# Altium PCB Atmel AVR consumer electronics control board.PcbDoc (part 2 of 4)
Units mm, origin at the board's own origin, x right, y up, seen from the top; angles counter-clockwise.
Board outline 310.13 x 89.13 mm, 2 copper layers (Top Layer, Top, Bottom Layer, Bottom); 455 components, 162 nets, 940 pads, 0 vias.
Unrouted connection lines stored in the file: 21.
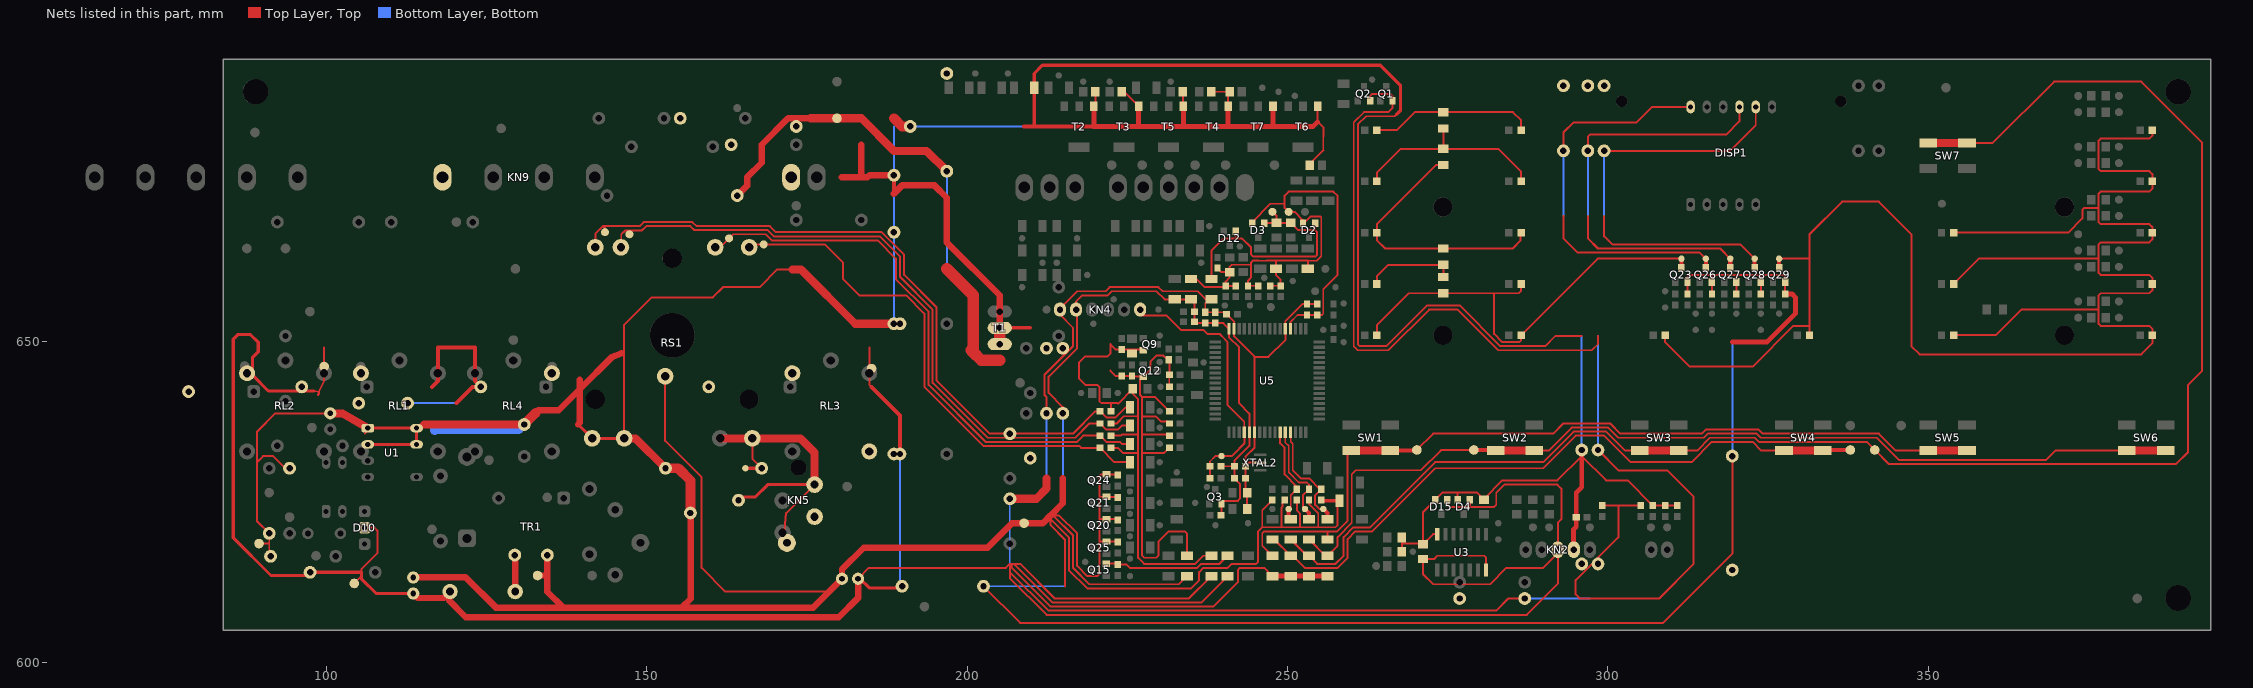
[diagram p2: the nets of this part, all layers, seen from the top]

## Components (designator, comment, footprint, x,y, rotation, side; value= is the part's Value field where it differs from the comment) (continued)
TP111 "TESTPAD" TEST_PAD_1.50mm 97.79,636.587 r90 top
TP113 "TESTPAD" TEST_PAD_1.50mm 222.567,677.545 r0 top
TP114 "TESTPAD" TEST_PAD_1.0mm 236.918,646.747 r0 top
TP115 "TESTPAD" TEST_PAD_1.0mm 230.06,650.938 r0 top
TP116 "TESTPAD" TEST_PAD_1.0mm 208.597,658.495 r0 top
TP117 "TESTPAD" TEST_PAD_1.0mm 211.772,662.305 r0 top
TP118 "TESTPAD" TEST_PAD_1.0mm 208.597,666.115 r0 top
TP119 "TESTPAD" TEST_PAD_1.0mm 214.312,691.515 r0 top
TP120 "TESTPAD" TEST_PAD_1.0mm 218.123,690.562 r0 top
TP121 "TESTPAD" TEST_PAD_1.0mm 244.157,655.637 r0 top
TP122 "TESTPAD" TEST_PAD_1.0mm 242.57,664.845 r0 top
TP123 "TESTPAD" TEST_PAD_1.0mm 218.757,660.4 r0 top
TP124 "TESTPAD" TEST_PAD_1.0mm 213.995,662.305 r0 top
TP125 "TESTPAD" TEST_PAD_1.0mm 217.17,666.115 r0 top
TP126 "TESTPAD" TEST_PAD_1.0mm 206.375,691.832 r0 top
TP127 "TESTPAD" TEST_PAD_1.0mm 201.295,691.832 r0 top
TP128 "TESTPAD" TEST_PAD_1.50mm 185.102,645.795 r0 top
TP129 "TESTPAD" TEST_PAD_1.0mm 246.062,689.61 r0 top
TP130 "TESTPAD" TEST_PAD_1.50mm 235.585,677.545 r0 top
TP131 "TESTPAD" TEST_PAD_1.0mm 235.585,624.84 r0 top
TP132 "TESTPAD" TEST_PAD_1.0mm 225.425,616.14 r0 top
TP133 "TESTPAD" TEST_PAD_1.0mm 172.403,645.795 r0 top
TP134 "TESTPAD" TEST_PAD_1.50mm 181.292,627.38 r0 top
TP135 "TESTPAD" TEST_PAD_1.50mm 133,613.5 r90 top
TP136 "TESTPAD" TEST_PAD_1.0mm 231.775,690.562 r0 top
TP137 "TESTPAD" TEST_PAD_1.50mm 231.457,677.545 r0 top
TP138 "TESTPAD" TEST_PAD_1.0mm 219.71,652.78 r0 top
TP139 "TESTPAD" TEST_PAD_1.0mm 248.602,688.975 r0 top
TP140 "TESTPAD" TEST_PAD_1.50mm 240.347,677.545 r0 top
TP141 "TESTPAD" TEST_PAD_1.50mm 89.535,618.49 r90 top
TP142 "TESTPAD" TEST_PAD_1.0mm 251.142,688.34 r0 top
TP143 "TESTPAD" TEST_PAD_1.50mm 104.394,612.267 r90 top
TP144 "TESTPAD" TEST_PAD_1.50mm 98.425,616.585 r90 top
TP145 "TESTPAD" TEST_PAD_1.0mm 222.25,690.562 r0 top
TP146 "TESTPAD" TEST_PAD_1.50mm 227.33,677.545 r0 top
TP147 "TESTPAD" TEST_PAD_1.0mm 255.587,651.827 r0 top
TP148 "TESTPAD" TEST_PAD_1.0mm 258.762,655.955 r0 top
TP149 "TESTPAD" TEST_PAD_1.0mm 237.807,668.02 r0 top
TP150 "TESTPAD" TEST_PAD_1.0mm 250.825,659.447 r0 top
TP151 "TESTPAD" TEST_PAD_1.25mm 290.83,621.03 r0 top
TP152 "TESTPAD" TEST_PAD_1.0mm 282.892,619.125 r0 top
TP153 "TESTPAD" TEST_PAD_1.0mm 282.892,621.665 r0 top
TP154 "TESTPAD" TEST_PAD_1.25mm 288.29,621.03 r0 top
TP155 "TESTPAD" TEST_PAD_1.0mm 269.558,617.22 r0 top
TP156 "TESTPAD" TEST_PAD_1.25mm 263.842,614.997 r0 top
TP157 "TESTPAD" TEST_PAD_1.0mm 239.712,632.142 r0 top
TP158 "TESTPAD" TEST_PAD_1.0mm 238.76,621.347 r0 top
TP159 "TESTPAD" TEST_PAD_1.0mm 237.427,627.317 r0 top
TP160 "TESTPAD" TEST_PAD_1.0mm 263.207,690.88 r0 top
TP161 "TESTPAD" TEST_PAD_1.0mm 257.493,658.495 r0 top
TP162 "TESTPAD" TEST_PAD_1.0mm 229.87,655.002 r0 top
TP163 "TESTPAD" TEST_PAD_1.0mm 222.885,656.59 r0 top
TP164 "TESTPAD" TEST_PAD_1.0mm 240.22,655.637 r0 top
TP165 "TESTPAD" TEST_PAD_1.0mm 258.762,649.923 r0 top
TP166 "TESTPAD" TEST_PAD_1.0mm 258.762,652.462 r0 top
TP167 "TESTPAD" TEST_PAD_1.50mm 94.297,622.617 r90 top
TP168 "TESTPAD" TEST_PAD_1.50mm 91.123,626.428 r90 top
TR1 "{Value}" NEVA_TRAFO 137.066,625.584 r180 top
U1 "LNK364" "DIP_8_7PIN_LNK364 DIP(Primary)" 106.5,636.5 r0 top
U3 "*" SO_14 273.368,614.362 r90 top
U5 "MEGA_64" QFP_14X14-64 238.76,649.923 r0 top
VDR2 "VDR10 320VAC %10" "VDR F7.5_2 D12 B4.4 H14.5_Primary" 156.845,623.252 r0 bottom
XTAL2 "8MHz" CSTCE_G 245.745,629.92 r90 top

## Footprints (in the part's own frame and the unit in brackets; to place one, negate y for a bottom-side part, rotate by r counter-clockwise, add the part's x,y. Pads: shape width x height; smd on the part's side, far side on the other; paste and mask are expansions set on the pad)
"3HSY81426B4_3HSY81426B4 AMB(Primary)" [mm]
  rrect50% 1.3x2 hole 0.8: 1(0,0)
  oval 1.3x2 hole 0.8: 2(2.54,0) 3(5.08,0) 4(7.62,0) 5(10.16,0) 7(12.7,15.24) 8(10.16,15.24) 9(7.62,15.24) 10(5.08,15.24) 11(2.54,15.24) 12(0,15.24)
  round 1.8 hole 1.8: 13(-10.75,16.12) 14(23.45,16.12)
  silkscreen extent -11.75,-1.88 24.45,17.12
35312_2 [mm]
  oval 1.9x2.6 hole 1: 1(0,0) 2(2.5,0)
  silkscreen extent -2.5,-2.5 5,4
35312_5 [mm]
  oval 1.9x2.6 hole 1: 1(0,0) 2(2.5,0) 3(5,0) 4(7.5,0) 5(10,0)
  silkscreen extent -2.5,-2.5 12.5,4
35312_6 [mm]
  oval 1.9x2.2 hole 1: 1(0,0) 2(2.5,0) 3(5,0) 4(7.5,0) 5(10,0) 6(12.5,0)
  silkscreen extent -2.5,-2.5 15,4
35978_2 [mm]
  oval 2.8x4.2 hole 1.8: 1(0,0) 2(3.96,0)
  silkscreen extent -1.98,-3.2 5.94,4.8
35978_3 [mm]
  oval 2.8x4.2 hole 1.8: 1(0,0) 2(3.96,0) 3(7.92,0)
  silkscreen extent -1.98,-3.2 9.9,4.8
35978_5 [mm]
  oval 2.8x4.2 hole 1.8: 1(0,0) 2(3.96,0) 3(7.92,0) 4(11.88,0) 5(15.84,0)
  silkscreen extent -1.98,-3.2 17.82,4.8
35979_4 [mm]
  oval 2.8x4.2 hole 1.8: 1(0,0) 2(7.92,0) 3(15.84,0) 4(23.76,0)
  silkscreen extent -1.98,-3.2 25.74,4.8
35979_5 [mm]
  oval 2.8x4.2 hole 1.8: 1(0,0) 2(7.92,0) 3(15.84,0) 4(23.76,0) 5(31.68,0)
  silkscreen extent -1.98,-3.2 33.66,4.8
91999_2_91999_0499(Primary) [mm]
  round 2.5 hole 2.5: 5(2.5,2.65)
  round 2.6 hole 1.3: a1(0,0) a2(5,-2.5) b1(0,-5) b2(5,-7.5)
  silkscreen extent -3.65,-11.2 8.65,3.7
C_0603 [mm]
  rect 1.1x1 smd: 1(0.102,0) 2(1.803,0)
  silkscreen extent -0.65,-0.7 2.55,0.7
C_0805_SIE_0805 [mm]
  rect 1.3x1.5 smd: 1(0.127,0) 2(2.413,0)
  silkscreen extent -0.73,-0.95 3.27,0.95
C_1206_SIE_1206 [mm]
  rect 1.29x1.9 smd: 1(0,0) 2(3.175,0)
  silkscreen extent -0.81,-1.1 3.99,1.1
"CER F2.5 D5 H11_Radial" [mm]
  round 1.9 hole 0.9: 1(0,0) 2(2.5,0)
  silkscreen extent -1.25,-2.75 4,2.5
"CER F2.5 D6.3 H11_Primary" [mm]
  round 1.9 hole 0.9: 1(0,0) 2(2.5,0)
  silkscreen extent -1.9,-3.25 4.5,3.15
"CER F5 D12.5 H25" [mm]
  round 2 hole 1: 1(0,0) 2(5,0)
  silkscreen extent -3.75,-6.25 8.8,6.25
"CFR F5 L7.5 B3.5 H12.5_Vertical" [mm]
  round 1.8 hole 0.9: 1(0,0) 2(5.08,0)
  silkscreen extent -1.25,-1.75 6.25,1.75
"CFR F15 L18 B5.3 H11_Primary" [mm]
  round 2 hole 1: 1(0,0) 2(15,0)
  silkscreen extent -1.5,-2.65 16.5,2.65
CSTCE_G [mm]
  rect 0.4x2 smd: 1(0,0) 2(1.2,0) 3(2.4,0)
  silkscreen extent -0.4,-0.65 2.8,0.65
DIP_4_300_MIL [mm]
  rrect50% 2x1.3 hole 0.8: 1(0,0)
  oval 2x1.3 hole 0.8: 2(0,-2.54) 3(7.62,-2.54) 4(7.62,0)
  silkscreen extent -0.89,-3.81 6.1,1.27
"DIP_8_7PIN_LNK364 DIP(Primary)" [mm]
  rrect50% 2x1.3 hole 0.8: 1(0,0)
  oval 2x1.3 hole 0.8: 2(0,-2.54) 3(0,-5.08) 4(0,-7.62) 5(7.62,-7.62) 7(7.62,-2.54) 8(7.62,0)
  silkscreen extent -0.89,-8.89 6.1,1.27
DO_15_500_MIL [mm]
  rrect50% 2.8x2.8 hole 1.4: 1(0,0)
  round 2.8 hole 1.4: 2(12.7,0)
  silkscreen extent 2.54,-1.78 10.16,1.78
DO_35_400_MIL [mm]
  rrect50% 2x2 hole 1: 1(0,0)
  round 2 hole 1: 2(10.16,0)
  silkscreen extent 2.03,-0.89 8.13,0.89
DO_35_500_MIL [mm]
  rrect50% 2x2 hole 1: 1(0,0)
  round 2 hole 1: 2(12.7,0)
  silkscreen extent 3.3,-0.89 9.4,0.89
DO_41_400_MIL [mm]
  oval 2.4x2.4 hole 1.2: 1(0,0) 2(10.16,0)
  silkscreen extent 1.27,-1.27 8.89,1.27
DTSL_62 [mm]
  rect 1.4x2.75 smd: 1(-2,-3.025) 2(2,-3.025) 3(-2,3.025) 4(2,3.025)
  silkscreen extent -3.2,-3.1 3.2,3.1
FIDUCIAL_1.5_3R [mm]
  round 1.5 smd: 1(0,0)
HS_63_10_Z0 [mm]
  Keep-Out Layer, Board lines w0.025: -7.9,-23.55 -7.9,-20.05 ; -7.9,-23.55 -7.9,-20.05 ; -7.9,-23.55 -10.1,-23.55 ; -7.9,-23.55 -10.1,-23.55 ; -7.9,-20.05 -10.1,-20.05 ; -7.9,-20.05 -10.1,-20.05 ; -10.1,-23.55 -10.1,-20.05 ; -10.1,-23.55 -10.1,-20.05 ; 0.1,-23.55 0.1,-20.05 -2.1,-20.05 -2.1,-23.55 0.1,-23.55 ; 0.1,20.05 -2.1,20.05 -2.1,23.55 0.1,23.55 0.1,20.05 ; -7.9,19.95 -7.9,23.45 -10.1,23.45 -10.1,19.95 -7.9,19.95
  silkscreen extent -10,-31.5 8,31.5
J_0805 [mm]
  rect 1.29x1.6 smd: 1(0,0) 2(2.54,0)
  silkscreen extent -0.78,-0.95 3.32,0.95
J_1206 [mm]
  rect 1.29x1.9 smd: 1(0,0) 2(3.175,0)
  silkscreen extent -0.81,-1.1 3.99,1.1
JMP_300 [mm]
  round 2 hole 1: 1(0,0) 2(7.62,0)
  silkscreen extent 1.27,-0.19 6.35,0.19
JMP_350 [mm]
  round 2 hole 1: 1(0,0) 2(8.89,0)
  silkscreen extent 1.27,-0.19 7.62,0.19
JMP_400 [mm]
  round 2 hole 1: 1(0,0) 2(10.16,0)
  silkscreen extent 1.27,-0.19 8.89,0.19
JMP_500 [mm]
  round 2 hole 1: 1(0,0) 2(12.7,0)
  silkscreen extent 1.27,-0.19 11.43,0.19
JMP_600_600_MIL [mm]
  round 2 hole 1: 1(0,0) 2(15.24,0)
  silkscreen extent 1.27,-0.19 13.97,0.19
JMP_700 [mm]
  round 2 hole 1: 1(0,0) 2(17.78,0)
  silkscreen extent 1.27,-0.19 16.51,0.19
JMP_800 [mm]
  round 2 hole 1: 1(0,0) 2(20.32,0)
  silkscreen extent 1.27,-0.19 19.05,0.19
JS1 [mm]
  round 2.5 hole 1.3: 1(0,0) 2(2,-6) 3(14.2,-6) 4(14.2,6) 5(2,6)
  silkscreen extent -2.3,-8 19.7,8
LTST_0805_N [mm]
  rect 1.15x1.2 smd: 1(-0.95,0) 2(0.95,0)
  silkscreen extent -1.91,-0.83 1.91,0.83
MINI_MELF_POL_Detent [mm]
  round 0 smd paste-25.4 mask-25.4: 1(-0.112,0) 2(3.287,0)
  Top Layer, Top region: 3.988,0.9 2.587,0.9 2.587,0.25 3.087,0.25 3.087,-0.25 2.587,-0.25 2.587,-0.9 3.988,-0.9
  Top Layer, Top region: -0.813,-0.9 0.588,-0.9 0.588,-0.25 0.088,-0.25 0.088,0.25 0.588,0.25 0.588,0.9 -0.813,0.9
  silkscreen extent -1.01,-1.1 4.19,1.1
NEVA_TRAFO [mm]
  rrect50% 2x2 hole 1: 1(0,0)
  round 2 hole 1: 2(10.16,0) 3(7.62,8.89) 4(2.54,8.89)
  silkscreen extent -1.91,-1.91 12.06,10.8
QFP_14X14-64 [mm]
  rect 1.8x0.5 smd: 1(0,0) 2(0,-0.8) 3(0,-1.6) 4(0,-2.4) 5(0,-3.2) 6(0,-4) 7(0,-4.8) 8(0,-5.6) 9(0,-6.4) 10(0,-7.2) 11(0,-8) 12(0,-8.8) 13(0,-9.6) 14(0,-10.4) 15(0,-11.2) 16(0,-12) 33(16.2,-12) 34(16.2,-11.2) 35(16.2,-10.4) 36(16.2,-9.6) 37(16.2,-8.8) 38(16.2,-8) 39(16.2,-7.2) 40(16.2,-6.4) 41(16.2,-5.6) 42(16.2,-4.8) 43(16.2,-4) 44(16.2,-3.2) 45(16.2,-2.4) 46(16.2,-1.6) 47(16.2,-0.8) 48(16.2,0)
  rect 0.5x1.8 smd: 17(2.1,-14.1) 18(2.9,-14.1) 19(3.7,-14.1) 20(4.5,-14.1) 21(5.3,-14.1) 22(6.1,-14.1) 23(6.9,-14.1) 24(7.7,-14.1) 25(8.5,-14.1) 26(9.3,-14.1) 27(10.1,-14.1) 28(10.9,-14.1) 29(11.7,-14.1) 30(12.5,-14.1) 31(13.3,-14.1) 32(14.1,-14.1) 49(14.1,2.1) 50(13.3,2.1) 51(12.5,2.1) 52(11.7,2.1) 53(10.9,2.1) 54(10.1,2.1) 55(9.3,2.1) 56(8.5,2.1) 57(7.7,2.1) 58(6.9,2.1) 59(6.1,2.1) 60(5.3,2.1) 61(4.5,2.1) 62(3.7,2.1) 63(2.9,2.1) 64(2.1,2.1)
  silkscreen extent 0.01,-12.9 15,2.13
R_0603 [mm]
  rect 1.1x1 smd: 1(0.102,0) 2(1.803,0)
  silkscreen extent -0.65,-0.7 2.55,0.7
R_0805_IPC_102A [mm]
  rect 1.3x1.5 smd: 1(0.32,0) 2(2.22,0)
  silkscreen extent -0.53,-0.95 3.07,0.95
R_0805_SIE_0805 [mm]
  rect 1.3x1.5 smd: 1(0.127,0) 2(2.413,0)
  silkscreen extent -0.73,-0.95 3.27,0.95
R_1206_SIE_1206 [mm]
  rect 1.29x1.9 smd: 1(0,0) 2(3.175,0)
  silkscreen extent -0.81,-1.1 3.99,1.1
RES_0207_400_MIL [mm]
  round 2 hole 1: 1(0,0) 2(10.16,0)
  silkscreen extent 1.65,-0.89 8.51,0.89
RES_0516 [mm]
  round 2.8 hole 1.2: 1(0,0) 2(22.86,0)
  silkscreen extent 2.23,-2.5 20.64,2.5
SDKZ1G0100_SDKZ1G0100(Primary) [mm]
  round 2.6 hole 1.3: 1(12.5,-16.1) 2(-12.5,-16.1) 3(12,13.7) 4(8,13.7) 5(-6.7,13.7) 6(-12,13.7) 8(1.1,-6.4) 9(7.5,-16.1) 10(-7.5,-16.1)
  round 3 hole 3 unplated: 10(0,12) 11(12,-10) 12(-12,-10)
  round 7 hole 7: 13(0,0)
  silkscreen extent -15.1,-17.1 15.1,15
SO_14 [mm]
  rect 2x0.65 smd: 1(0,0) 2(0,-1.27) 3(0,-2.54) 4(0,-3.81) 5(0,-5.08) 6(0,-6.35) 7(0,-7.62) 8(5.588,-7.62) 9(5.588,-6.35) 10(5.588,-5.08) 11(5.588,-3.81) 12(5.588,-2.54) 13(5.588,-1.27) 14(5.588,0)
  silkscreen extent -1.02,-8.25 4.32,1.27
SOD_57_400_MIL [mm]
  round 2.3 hole 1.1: 1(0,0) 2(10.16,0)
  silkscreen extent 1.52,-1.93 8.64,1.93
SOT_23(AKC)_IPC_210 [mm]
  rect 1x1.2 smd: 1(0.002,-0.148) 2(1.903,-0.148) 3(0.952,2.053)
  silkscreen extent -0.55,0.25 2.45,1.65
SOT_23(BEC)_IPC_210 [mm]
  rect 1x1.2 smd: 1(0.002,-0.148) 2(1.903,-0.148) 3(0.953,2.053)
  silkscreen extent -0.55,0.25 2.45,1.65
SOT_223(A1A2G) [mm]
  rect 1.2x1.5 smd: 1(-2.3,0) 2(0,0) 3(2.3,0)
  rect 3.3x1.5 smd: 4(0,6.4)
  silkscreen extent -3.3,1.4 3.3,4.95
TEST_PAD_1.0mm [mm]
  round 1 smd: 1(0,0)
TEST_PAD_1.25mm [mm]
  round 1.25 smd: 1(0,0)
TEST_PAD_1.50mm [mm]
  round 1.5 smd: 1(0,0)
TO_92(RAC) [mm]
  rrect50% 1.8x1.8 hole 0.8: 1(0,0) 2(2.54,0) 3(5.08,0)
  silkscreen extent 0.03,-1.52 5.07,2.67
TO_220AB(A1A2G)_TO_220AB [mm]
  oval 1.9x3.8 hole 1: 1(0,0) 2(2.54,0) 3(5.08,0)
  silkscreen extent -2.54,-2.54 7.62,3.17
"VDR F7.5_2 D12 B4.4 H14.5_Primary" [mm]
  round 2 hole 1: 1(0,0) 2(7.5,-2)
  silkscreen extent -2.25,-3.2 9.75,1.2

## Part data
C1: "CAP TH AL. ELEC 10uF 25V %20 85C F=2.5/5x11"
C2: "CAP TH AL. ELEC 10uF 450V %20 105C HRL F=5/12.5X25"
C4: "Capacitor"
C5 C7: "CAP TH AL. ELEC 220uF 16V %20 105C F=2.5/6.3x11"
C6 C23 C27 C32 C45: "CAP 0603 CER 100nF 50V %10 X7R"
C8 C10 C13 C30 C34 C47 C53 C54 C55 C56 C57 C58 C59 C60 C61: "CAP 0603 CER 10nF 50V %10 X7R"
C11: "CAP TH POLY 100nF 63Vdc %5 MKT F=5mm"
C12: "CAP 0805 CER 10nF 50V %10 X7R"
C15 C49 C50: "CAP 0603 CER 560pF 50V %10 X7R"
C16: "CAP 0805 CER 1nF 50V %10 X7R"
C17: "CAP 1206 CER 1nF 50V %10 X7R"
C28 C29 C31 C33 C43 C46 C48: "CAP 0603 CER 1nF 50V %10 X7R"
C35: "CAP 0805 CER 470nF 50V %10 X7R"
D2 D5 D7 TR1: "{Description}"
D3 D4 D12 D15: "DIODE SMD 70V 200mA BAV99"
D6: "DIODE TH 600V 1A BYV26C"
D8: "DIODE ZENER TVS TH 200V 100A 600W"
D9 D27: "DIODE SMD 100V 150mA 1N4148"
D10: "LINEAR TH TL431ACLP +2.5V %1 SHUNT REGULATOR"
D11: "DIODE TH 60V 1A SB160"
D31 D33 D34 D35: "Fast Diode"
DISP1: "Display"
F1 F2 F4: "Fiducial"
HS1: "HEAT SINK EROS (CMI)"
J1 J2 J3 J4 J5 J6 J7 J8 J9 J11 J12 J13 J14 J15 J16 J17 J19 J20 J21 J22 J23 J24 J25 J26 J28 J29 J30 J31 J33 J34 J35 J37 J38 J39 J40 J41 J42 J44 J53 J55: "Jumper"
J18: "JUMPER TELI 350mil / 0.6mm KALAYLI"
JM1: "JUMPER TELI 800mil / 0.6mm KALAYLI"
JM2: "JUMPER TELI 500mil / 0.6mm KALAYLI"
JM3: "JUMPER TELI 400mil / 0.6mm KALAYLI"
KN1: "KONN 7.92mm 5' LI DIK 35979_0510"
KN2: "KONN 2.50mm 5' LI DIK 35312_0510"
KN3: "KONN 3.96mm 5' LI DIK 35978_0510"
KN4: "KONN 2.50mm 6' LI DIK 35312_0610"
KN5: "PIN HEADER 5mm 2'LI DIK 16A 91999_0499"
KN6: "KONN 3.96mm 3'LU DIK 35978_0310"
KN7: "2.50 mm Header"
KN8: "KONN 3.96mm 2'LI DIK 35978_0210"
KN9: "KONN 7.92mm 4'LU DIK 35979_0410"
LD1 LD2 LD3 LD4 LD5 LD6 LD7 LD8 LD9 LD10 LD11 LD12 LD13 LD14 LD15 LD16 LD17 LD18 LD19 LD20: "Led"
OPT1: "OPTOCOUPLER TH TRANS PC817A (CRT=80 to 160 (%))"
Q1 Q2 Q9: "TRANS SMD NPN BC847B SOT-23"
Q3 Q12 Q20 Q21 Q24 Q25: "TRANS SMD PNP BC857B SOT-23"
Q15: "TRANS SMD NPN BC817-25/40 SOT-23"
Q23 Q26 Q27 Q28 Q29: "TRANS SMD PNP BC807-25 SOT-23"
R1 R2 R11 R55 R96: "RES 0603 10K %5 1/10W"
R3 R5 R12 R15 R16 R17 R20 R24 R31 R36: "RES 0805 300R %5 1/8W"
R4: "RES AXIAL CARB 100R %5 1/4W FP"
R6 R7 R14 R27: "RES AXIAL CARB 10K %5 1/4W"
R8 R10: "RES 0805 33K %5 1/8W"
R9 R100: "RES AXIAL CARB 1K %5 1/4W"
R18 R88 R134 R144 R148 R149 R150 R151 R165 R167 R168 R179: "RES 0603 47K %5 1/10W"
R19 R46: "RES AXIAL MET. FILM 150K %1 1/2W SS HV"
R21 R34 R61 R73 R91: "RES 1206 330R %5 1/4W"
R23: "RES AXIAL 22R %5 2W WW"
R26: "RES 0603 1K5 %1 1/10W"
R35 R38: "RES 0805 100K %1 1/8W"
R39: "RES 0805 560R %1 1/8W"
R40 R70: "RES 0805 4K7 %5 1/8W"
R41: "RES 0805 1K5 %1 1/8W"
R42: "RES 0805 150R %5 1/8W"
R43: "RES 1206 300R %5 1/4W"
R50 R62 R74 R80 R81 R86: "RES 0805 1K %5 1/8W"
R53 R112: "RES 0603 1K %5 1/10W"
R56: "RES 0805 22K %5 1/8W"
R66 R84: "RES 0805 18K %1 1/8W"
R67 R108 R157 R159 R163: "RES 0603 100K %5 1/10W"
R68: "RES AXIAL CARB 13K %5 1/4W"
R69: "RES AXIAL CARB 22K %5 1/4W"
R82 R85: "RES 1206 18K %1 1/4W"
R97 R103 R109 R111 R145 R146 R153 R155 R158 R160 R161 R164 R166 R169 R172: "RES 1206 10K %5 1/4W"
R98: "RES 0805 10K %5 1/8W"
R101: "RES 0603 330K %5 1/10W"
R102: "RES 0603 22K %5 1/10W"
R110: "RES 0603 33K %5 1/10W"
R113 R130 R131: "RES 1206 220K %1 1/4W"
R115: "RES AXIAL CARB 47R %5 1/4W"
R116: "RES 1206 6K8 %5 1/4W"
R117 R132 R133: "RES 1206 150K %5 1/4W"
R120: "RES 0805 6K8 %5 1/8W"
R121 R124 R125 R126 R127 R128 R129 R135 R136 R154 R156 R162 R170: "RES 1206 100K %5 1/4W"
R137: "RES 1206 8K2 %1 1/4W"
R152 R171 R173 R175 R177: "RES 0603 6K8 %5 1/10W"
RL1 RL2 RL3 RL4: "RELAY SPDT 5V 10A 16x22x16mm FULLY SEALED"
RS1: "ANAHTAR TH ROTARY SWITCH DIK 16 POSITIONS(15 + ON/OFF)"
SW1 SW2 SW3 SW4 SW5 SW6 SW7: "ANAHTAR SMD TACT VERT 160GF 6x6x3.1mm"
T1: "TRIAC TH BTB16-600BW"
T2 T3 T4 T5 T6 T7: "TRIAC SMD 600V 1A Z0107MN"
TP1 TP2 TP3 TP4 TP5 TP6 TP7 TP8 TP10 TP11 TP17 TP20 TP21 TP22 TP23 TP24 TP25 TP26 TP27 TP28 TP29 TP30 TP31 TP32 TP33 TP34 TP35 TP36 TP37 TP38 TP39 TP40 TP41 TP42 TP43 TP44 TP45 TP46 TP47 TP48 TP49 TP50 TP51 TP52 TP53 TP54 TP55 TP56 TP57 TP58 TP59 TP60 TP61 TP62 TP63 TP64 TP65 TP66 TP67 TP68 TP69 TP70 TP71 TP72 TP73 TP74 TP75 TP76 TP77 TP78 TP79 TP80 TP81 TP82 TP83 TP84 TP85 TP86 TP87 TP88 TP89 TP90 TP91 TP92 TP93 TP94 TP95 TP96 TP97 TP98 TP99 TP100 TP101 TP102 TP103 TP104 TP105 TP106 TP107 TP108 TP109 TP110 TP111 TP113 TP114 TP115 TP116 TP117 TP118 TP119 TP120 TP121 TP122 TP123 TP124 TP125 TP126 TP127 TP128 TP129 TP130 TP131 TP132 TP133 TP134 TP135 TP136 TP137 TP138 TP139 TP140 TP141 TP142 TP143 TP144 TP145 TP146 TP147 TP148 TP149 TP150 TP151 TP152 TP153 TP154 TP155 TP156 TP157 TP158 TP159 TP160 TP161 TP162 TP163 TP164 TP165 TP166 TP167 TP168: "Test Pad"
U1: "IC SMPS CONTROLLER THD LNK364PN"
U3: "LOGIC SMD 4069 HEX INVERTER"
U5: "Microcontroller"
VDR2: "KODSUZ"
XTAL2: "REZ CER SMD 8MHz 15pF %0.5 80C"

## Free pads (board coordinates)
  round 4 hole 4 unplated: 0(89,689) 0(389,610) 0(389,689)
  oval 2.8x4.2 smd: 0(243.355,674.053)
  round 3 hole 3 unplated: 0(274.25,651) 0(274.25,671) 0(371.25,651) 0(371.25,671)
  round 1.5 smd: 1(382.587,609.918)

## Nets (pads, with @x,y where several pads share a name; then routed paths per layer and width w, separated by ;. In a path a pad name is that pad's centre, name@x,y a point inside that pad or via, vN(x,y) a via of type N, cw(c..) or ccw(c..) an arc to the next point about the centre after c; other vN are vias at no path point)
0V: C1.1 C2.1 C4.2 C5.2 C7.2 C8.2 C10.2 C12.1 C13.2 C15.1 C16.2 C17.2 C23.1 C27.1 C28.1 C29.1 C30.2 C31.2 C32.2 C34.2 C35.2 C43.2 C45.1 C46.1 C47.1 C48.1 C49.2 C50.2 C53.1 C54.1 C55.1 C56.1 C57.1 C58.1 C59.1 C60.1 C61.1 D2.2 D3.2 D4.2 D11.1 D15.2 D27.1 J5.1 J5.2 J15.1 J15.2 J18.1 J18.2 J21.1 J21.2 J23.1 J23.2 J26.1 J26.2 J29.1 J29.2 J30.1 J30.2 J35.1 J35.2 KN2.2 KN4.5 KN8.2 Q3.2 Q12.2 Q20.2 Q21.2 Q23.2 Q24.2 Q25.2 Q26.2 Q27.2 Q28.2 Q29.2 R4.2 R7.2 R9.2 R11.2 R18.1 R35.2 R40.2 R50.2 R62.2 R67.1 R69.2 R74.2 R80.2 R81.2 R82.2 R85.2 R86.2 R88.1 R100.2 R101.1 R102.2 R110.1 R124.2 R137.1 R144.1 R148.1 R149.1 R150.1 R151.1 R165.1 R167.1 R168.1 R179.1 RL3.3 RS1.1 RS1.8 RS1.9 T1.1 T2.1 T3.1 T4.1 T5.1 T6.1 T7.1 TP5.1 TP10.1 TP135.1 TP141.1 TR1.3 TR1.4 U1.1 U1.2 U1.7 U1.8 U3.14 U5.21 U5.52 U5.64 VDR2.1 | length 1512.5
  Top Layer, Top w0.292: D27.1@222.362,645.477 223.212,644.627 R67.1@224.155,644.627 ; 222.567,657.86 229.552,657.86 ; 227.33,632.625 227.33,616.585 227.647,616.267 229.552,616.267 229.87,616.585 229.87,618.808 231.457,620.395 233.998,620.395 234.315,620.077 J21.1@234.315,616.585 ; 227.33,635.483 231.395,635.483 C60.1@231.56,635.317 ; 227.33,638.34 229.425,638.34 230.226,637.54 231.242,637.54 C57.1@231.56,637.222 ; C31.2@231.56,642.938 C30.2@231.56,644.842 ; R137.1@232.41,656.59 J35.2@234.95,656.59 235.483,656.057 R88.1@235.483,654.685 R18.1@235.483,653.097 ; R74.2@233.678,688.975 233.678,686.832 T5.1@233.758,686.752 ; R62.2@238.123,688.975 R81.2@240.985,688.975 240.743,688.733 T4.1@240.743,686.752 ; R11.2@239.61,622.935 239.71,623.035 Q3.2@239.71,624.692 240.175,625.158 242.252,625.158 242.57,625.475 242.57,627.8 C45.1@241.72,628.65 ; 240.982,661.67 241.3,661.987 244.323,661.987 ; 241.617,615.315 245.11,615.315 245.427,615.632 245.427,620.395 246.062,621.03 ; C10.2@243.84,658.71 C50.2@245.427,658.71 ; 245.491,662.622 246.697,662.622 ; C8.2@247.332,658.71 C49.2@248.92,658.71 ; C48.1@247.65,625.26 246.062,623.672 246.062,621.03 ; C61.1@249.555,625.26 249.237,624.942 249.237,624.269 249.085,624.116 249.085,621.03 ; U5.52@250.46,652.023 250.46,653.05 251.562,654.152 C29.1@253.047,654.152 C27.1@254.635,654.152 255.372,654.152 255.587,654.367 255.587,658.178 257.81,660.4 257.81,672.783 257.175,673.418 256.222,673.418 ; C59.1@251.46,625.26 251.46,623.659 251.93,623.189 251.93,621.03 ; 253.174,662.622 254.571,662.622 255.27,663.321 255.27,669.417 255.143,669.544 254.19,669.544 ; C56.1@253.365,625.26 253.365,624.624 254.8,623.189 254.8,621.03 ; 254.713,684.29 T6.1@254.713,686.752 ; 255.587,679.831 255.587,681.99 ; C17.2@258.127,625.158 257.81,624.84 257.81,621.347 257.493,621.03 254.8,621.03 ; 260.985,657.86 260.985,649.605 261.303,649.288 265.43,649.288 271.78,655.637 276.86,655.637 283.21,649.288 290.195,649.288 291.782,650.875 295.91,650.875 ; C16.2@267.843,617.22 267.843,618.49 ; R40.2@267.843,619.442 267.843,618.49 ; C12.1@271.145,618.363 271.018,618.49 267.843,618.49 ; 246.063,621.03 249.085,621.03 ; 249.085,621.03 251.93,621.03 ; 251.93,621.03 254.8,621.03
  Top Layer, Top w0.3: TP141.1@89.535,618.49 91.123,618.49 ; R7.2@90.805,620.712 R7.2@91.123,620.077 ; R4.2@91.34,616.5 91.123,616.717 91.123,618.49 ; R9.2@94.297,630.237 93.662,630.237 91.757,632.142 90.17,632.142 89.218,631.19 ; C1.1@100.647,638.81 92.075,638.81 89.218,635.952 89.218,631.19 ; 89.218,631.19 89.218,621.982 R7.2@91.123,620.077 ; 91.123,618.49 R7.2@91.123,620.077
  Top Layer, Top w0.305: 106.045,635.635 106.5,636.09 U1.1@106.5,636.5 ; RS1.9@146.5,634.9 146.5,652.595 150.812,656.908 160.338,656.908 161.925,658.495 167.64,658.495 170.41,661.265 172.752,661.265 ; RS1.8@152.9,644.6 152.9,634.5 158.6,628.8 158.6,614.7 162.3,611 178.5,611 ; J29.1@202.565,611.822 208.28,606.107 308.61,606.107 319.405,616.902 J23.1@319.405,632.142 ; J5.1@214.947,638.81 214.947,639.762 212.725,641.985 212.725,644.525 217.17,648.97 217.17,654.845 KN4.5@217.012,655.002 217.012,656.272 217.965,657.225 221.933,657.225 222.567,657.86 ; 215.265,611.822 215.265,619.125 213.042,621.347 213.042,622.3 ; T2.1@219.788,686.752 220.025,686.99 R50.2@220.025,688.975 ; R168.1@223.52,618.705 223.42,618.805 Q25.2@221.763,618.805 221.76,618.808 220.662,618.808 ; R144.1@223.52,622.198 223.42,622.298 Q20.2@221.763,622.298 221.76,622.3 220.662,622.3 ; R165.1@223.52,625.69 223.42,625.79 Q21.2@221.763,625.79 221.76,625.793 220.662,625.793 ; R167.1@223.52,629.183 223.42,629.283 Q24.2@221.763,629.283 220.978,629.283 220.662,628.967 220.662,625.793 ; R80.2@224.153,688.975 224.55,688.975 T3.1@226.773,686.752 ; R67.1@224.155,644.627 C32.2@225.742,644.627 225.842,644.527 Q12.2@227.5,644.527 ; 229.552,657.86 230.822,656.59 R137.1@232.41,656.59 ; C58.1@231.56,633.413 230.773,632.625 227.33,632.625 227.33,635.483 227.33,638.34 227.33,641.35 ; C54.1@231.56,639.127 229.337,641.35 227.33,641.35 ; C30.2@231.56,644.842 231.56,646.747 231.457,646.85 R102.2@231.457,647.167 231.292,647.167 230.632,647.827 229.552,647.827 228.6,646.875 228.6,645.627 Q12.2@227.5,644.527 ; J21.2@234.315,613.41 233.045,612.14 219.075,612.14 216.535,614.68 216.535,619.76 213.44,622.855 ; J35.1@234.95,659.765 235.839,659.765 237.109,658.495 240.132,658.495 C15.1@240.347,658.71 ; R18.1@235.483,653.097 235.697,652.882 C23.1@237.172,652.882 C28.1@238.76,652.882 240,652.882 U5.64@240.86,652.023 240.86,650.68 242.443,649.097 242.443,640.397 244.06,638.781 U5.21@244.06,635.823 244.06,633.73 241.72,631.39 C46.1@241.72,630.555 ; R101.1@239.077,661.455 239.688,660.844 C35.2@240.982,660.844 ; C43.2@239.61,630.555 C46.1@241.72,630.555 ; 240.982,661.67 C35.2@240.982,660.844 ; 241.617,615.315 241.3,615.315 240.665,614.68 236.855,614.68 236.22,614.045 236.22,612.775 234.95,611.505 218.757,611.505 215.9,614.362 215.9,619.442 213.042,622.3 ; C45.1@241.72,628.65 C46.1@241.72,630.555 ; C34.2@241.935,658.71 C15.1@240.347,658.71 ; C10.2@243.84,658.71 243.84,659.524 244.323,660.006 244.323,661.987 244.335,662 244.335,662.343 244.615,662.622 245.491,662.622 ; D3.2@244.477,668.485 244.477,668.65 247.34,671.512 249.555,671.512 ; 246.697,662.622 248.221,662.622 ; C49.2@248.92,658.71 248.92,659.663 248.221,660.361 R85.2@248.221,661.352 248.221,662.622 ; R82.2@253.174,661.352 253.174,662.622 248.221,662.622 ; R86.2@253.494,677.545 253.494,677.738 255.587,679.831 ; 254.19,669.544 253.619,669.544 252.56,668.485 D2.2@252.415,668.485 252.415,668.97 251.142,670.242 TP5.1@250.19,670.242 249.555,670.877 249.555,671.512 ; 254.713,684.29 255.587,683.415 255.587,681.99 ; 256.222,673.418 250.19,673.418 249.555,672.783 249.555,671.512 ; 260.985,657.86 260.985,683.895 262.255,685.165 266.7,685.165 267.017,685.482 ; U3.14@273.368,619.95 272.733,619.95 C12.1@271.145,618.363 271.145,623.398 D15.2@273.052,625.305 274.175,626.428 276.225,626.428 ; D4.2@276.545,625.305 276.545,626.425 276.227,626.425 276.225,626.428 ; J30.1@295.91,633.095 J30.1@295.91,632.142 ; C47.1@310.832,624.42 R110.1@308.928,624.42 C53.1@307.022,624.42 303.11,628.332 299.72,628.332 J30.1@295.91,632.142 ; R148.1@312.42,657.44 312.42,657.397 312.418,657.395 Q23.2@312.418,659.3 312.42,659.302 312.42,660.4 316.23,660.4 ; R149.1@316.23,657.44 316.23,659.298 Q26.2@316.228,659.3 316.23,659.302 316.23,660.4 ; R150.1@320.04,657.44 320.04,657.397 320.038,657.395 Q27.2@320.038,659.3 320.04,659.302 320.04,660.4 ; R151.1@323.85,657.44 323.85,657.397 323.848,657.395 Q28.2@323.848,659.3 323.85,659.302 323.85,660.4 ; R179.1@327.66,657.44 327.66,657.397 327.658,657.395 Q29.2@327.658,659.3 327.658,660.082 327.34,660.4 323.85,660.4 ; 213.042,622.3 213.042,622.855 213.44,622.855 ; 213.44,622.855 214.393,622.855 217.17,620.077 217.17,614.997 218.757,613.41 220.345,613.41 220.662,613.727 220.662,618.808 ; 220.662,618.808 220.662,622.3 ; 220.662,622.3 220.662,625.793 ; 227.33,641.35 227.012,641.668 227.012,644.04 Q12.2@227.5,644.527 ; C15.1@240.347,658.71 240.347,659.371 240.982,660.006 C35.2@240.982,660.844 ; 276.225,626.428 279.59,626.428 R35.2@280.67,625.348 280.67,625.475 283.527,628.332 292.1,628.332 J30.1@295.91,632.142 ; 316.23,660.4 320.04,660.4 ; 320.04,660.4 323.85,660.4
  Top Layer, Top w0.5: U1.2@106.5,633.96 U1.7@114.12,633.96 U1.8@114.12,636.5 ; U1.1@106.5,636.5 U1.8@114.12,636.5 ; 115.29,637.07 U1.8@114.12,636.5 ; 139.33,637.07 RS1.1@141.5,634.9
  Top Layer, Top w0.508: RS1.1@141.5,634.9 RS1.9@146.5,634.9 ; 205.105,652.145 209.867,652.145 ; 210.502,683.577 R124.2@210.502,689.61 210.502,691.832 211.772,693.102 264.477,693.102 267.652,689.928 267.652,686.117 267.017,685.482 ; C55.1@255.27,625.26 255.372,625.158 C17.2@258.127,625.158
  Top Layer, Top w0.635: 188.595,673.1 J18.1@188.595,675.957 ; 208.915,683.577 210.502,683.577 219.71,683.577
  Top Layer, Top w0.762: T2.1@219.788,686.752 219.788,683.655 219.71,683.577 226.695,683.577 ; T3.1@226.773,686.752 226.773,683.655 226.695,683.577 ; T5.1@233.758,686.752 233.758,683.655 233.68,683.577 ; T4.1@240.743,686.752 240.743,683.655 240.665,683.577 ; T7.1@247.728,686.752 247.728,683.655 247.65,683.577 ; 254.713,684.29 254,683.577 247.65,683.577 ; KN2.2@294.68,617.538 294.68,617.617 294.64,617.657 294.64,620.712 295.06,621.132 C13.2@295.06,622.617 295.06,626.428 295.91,627.278 J30.1@295.91,632.142 ; 319.405,649.923 324.803,649.923 329.248,654.367 329.248,656.908 328.715,657.44 R179.1@327.66,657.44 ; 226.695,683.577 233.68,683.577 ; 233.68,683.577 240.665,683.577 ; 240.665,683.577 247.65,683.577
  Top Layer, Top w1: C5.2@113.6,613.2 113.65,613.25 121.75,613.25 126.5,608.5 137,608.5 ; TR1.3@129.446,616.694 129.5,616.64 D11.1@129.5,611 ; 132.7,638.861 132.7,638.9 133.1,639.3 136.3,639.3 139.579,642.579 ; TP135.1@133,613.5 134.526,613.5 ; TR1.4@134.526,616.694 134.526,613.5 ; 139.33,637.07 139.6,637.34 139.579,642.579 ; 139.573,644.081 139.579,642.579 ; 146.035,648.172 144.6,647.6 139.579,642.579 ; VDR2.1@156.9,623.3 156.9,609.9 155.5,608.5 ; 189.23,617.855 183.896,617.855 180.5,614.459 C7.2@180.5,613 178.5,611 176,608.5 155.5,608.5 ; 213.042,622.855 214.947,624.76 214.947,628.65 ; 134.526,613.5 134.526,610.974 137,608.5 ; 137,608.5 155.5,608.5
  Top Layer, Top w1.016: 180.49,675.64 183.515,675.64 ; 183.515,680.72 183.515,675.64 ; 188.595,673.1 189.865,674.37 194.945,674.37 196.85,672.465 196.85,665.48 205.105,657.225 205.105,652.145 ; J18.1@188.595,675.957 184.785,675.957 184.468,675.64 183.515,675.64 ; 189.23,617.855 203.2,617.855 207.01,621.665 TP10.1@208.915,621.665 211.853,621.665 213.042,622.855
  Top Layer, Top w1.27: C1.1@100.647,638.81 102.552,638.81 U1.1@106.5,636.5 ; RS1.9@146.5,634.9 148.295,634.9 C4.2@152.957,630.237 ; 172.752,661.265 174.078,661.265 182.562,652.78 J26.1@188.595,652.78
  Top Layer, Top w1.3: 115.29,637.07 C2.1@130.909,637.07
  Top Layer, Top w1.524: C2.1@130.909,637.07 132.7,638.861 ; C4.2@152.957,630.237 154.94,630.237 156.845,628.332 VDR2.1@156.845,623.252 156.853,623.252 VDR2.1@156.9,623.3 ; 188.595,684.847 189.865,683.577 J15.1@191.135,683.577
  Top Layer, Top w1.778: T1.1@205.105,649.605 205.105,652.145
  Bottom Layer, Bottom w0.292: J29.1@202.565,611.822 215.265,611.822
  Bottom Layer, Bottom w0.305: J26.1@188.595,652.78 J18.2@188.595,667.067 188.595,673.1 ; J18.1@188.595,675.957 188.595,683.577 ; J15.1@191.135,683.577 208.915,683.577 ; 214.947,628.65 J5.1@214.947,638.81 ; J30.1@295.91,633.095 295.91,650.875 ; J23.1@319.405,632.142 319.405,649.923
  Bottom Layer, Bottom w1.5: 116.967,636.207 117.094,636.333 130.048,636.333 130.785,637.07 C2.1@130.909,637.07
220_LINE: C4.1 KN5.a1 KN5.b1 R23.1 RS1.2 RS1.10@154,663 TP8.1 VDR2.2 | length 53.2
  Top Layer, Top w0.305: RS1.2@166.5,634.9 166.5,631.695 C4.1@167.957,630.237 ; KN5.a1@176.213,627.697 171.767,623.252 171.4,618.9 171.5,618.9 R23.1@171.7,618.7 ; R23.1@171.7,618.7 171.9,618.5 R23.1@171.9,618.6 R23.1@171.7,618.7
  Top Layer, Top w0.508: VDR2.2@164.4,625.3 164.4,625.697 164.345,625.753 166.965,625.753 168.91,627.697 KN5.a1@176.213,627.697 ; TP8.1@165.417,630.237 C4.1@167.957,630.237
  Top Layer, Top w1.27: 161.5,634.9 RS1.2@166.5,634.9 174.01,634.9 176.213,632.698 KN5.a1@176.213,627.697
-5V: C5.1 C6.2 C7.1 C12.2 C23.2 C27.2 C28.2 C29.2 C33.2 C45.2 C46.2 D2.1 D3.1 D4.1 D9.2 D10.2 D11.2 D12.1 D15.1 D31.2 D33.2 D34.2 D35.2 J1.1 J1.2 J2.1 J2.2 J4.1 J4.2 J14.1 J14.2 J17.1 J17.2 J22.1 J22.2 J24.1 J24.2 J31.1 J31.2 J34.1 J34.2 KN2.3 KN4.6 Q1.2 Q2.2 Q9.2 Q15.2 R6.1 R8.1 R10.2 R26.2 R56.2 R66.1 R84.1 R108.2 R112.2 R120.2 R134.2 R154.2 R156.2 R157.2 R159.2 R162.2 R163.2 R170.2 RL1.5 RL2.5 RL3.5 RL4.2 TP6.1 TP17.1 TP128.1 TP143.1 U3.7 U5.22 U5.53 U5.63 XTAL2.2 | length 1129.9
  Top Layer, Top w0.254: R6.1@97,613.5 R6.1@97.5,614 ; 98.105,642.3 98.86,642.2
  Top Layer, Top w0.292: 216.535,652.145 214.512,654.168 KN4.6@214.512,655.002 214.512,655.202 217.17,657.86 ; Q15.2@221.737,615.351 223.382,615.351 R134.2@223.52,615.213 224.892,615.213 225.425,614.68 226.275,614.68 ; 222.25,658.495 229.87,658.495 230.505,657.86 235.903,657.86 ; D9.2@222.362,649.605 222.362,648.13 221.933,647.7 218.44,647.7 217.487,646.747 217.487,644.207 218.44,643.255 220.345,643.255 220.662,642.938 220.662,640.715 220.98,640.397 222.567,640.397 ; R159.2@222.465,633.413 223.52,633.413 224.307,632.625 ; R108.2@222.465,639.127 222.465,640.295 222.567,640.397 ; R56.2@225.869,642.62 223.583,640.334 223.52,640.397 222.567,640.397 ; C23.2@237.172,654.583 C28.2@238.76,654.583 ; J34.1@238.125,659.765 238.125,664.21 240.03,666.115 241.933,666.115 242.887,666.115 ; C6.2@240.513,654.24 241.66,653.094 U5.63@241.66,652.023 ; 243.42,631.19 243.49,631.12 XTAL2.2@245.745,631.12 ; R8.1@243.713,623.887 R10.2@243.713,626.428 ; D3.1@246.378,668.485 248.242,668.485 R84.1@248.285,668.528 ; 247.459,663.257 254.317,663.257 254.635,663.575 254.635,667.067 ; U5.53@249.66,652.023 249.66,653.203 252.31,655.853 C29.2@253.047,655.853 C27.2@254.635,655.853 ; R66.1@250.507,668.528 251.65,667.385 252.412,667.385 ; D2.1@254.315,668.485 254.317,668.483 254.317,667.385 ; Q2.2@262.888,687.557 262.89,687.56 262.89,688.34 263.207,688.658 266.065,688.658 266.382,688.34 266.382,687.56 Q1.2@266.38,687.557 266.382,687.555 266.382,686.435 265.748,685.8 261.938,685.8 260.35,684.212 260.35,649.288 260.985,648.652 265.748,648.652 272.097,655.002 276.542,655.002 282.892,648.652 297.498,648.652 298.45,649.605 298.45,650.875
  Top Layer, Top w0.305: 99.663,649.065 99.695,649.032 TP17.1@99.695,646.112 99.695,643.89 98.86,642.2 ; TP143.1@104.394,612.267 105.41,613.283 105.5,613.283 ; 105.5,614 105.5,614.5 108,617 108,620.5 107.5,621 106.04,621 D10.2@106,620.96 ; C7.1@183,613 184.68,614.68 206.058,614.68 206.692,615.315 ; 184.753,649.065 TP128.1@184.753,645.795 ; 185.102,642.938 184.753,643.287 TP128.1@184.753,645.795 ; TP128.1@185.102,645.795 TP128.1@184.753,645.795 ; 207.008,615 206.692,615.315 ; J4.1@212.407,638.81 212.407,641.35 212.09,641.668 212.09,644.842 216.535,649.288 216.535,652.145 ; 217.17,657.86 221.615,657.86 222.25,658.495 ; D9.2@222.362,649.605 223.212,648.755 C33.2@224.155,648.755 R120.2@225.742,648.755 ; R163.2@222.465,635.317 223.99,635.317 224.155,635.483 226.695,635.483 ; R157.2@222.465,637.222 223.342,637.222 224.472,638.353 226.695,638.353 ; 224.307,632.625 226.695,632.625 ; R120.2@225.742,648.144 R120.2@225.742,648.755 ; R56.2@225.869,642.62 225.869,641.858 226.695,641.033 226.695,638.353 ; 226.275,614.68 235.903,614.68 236.537,615.315 239.395,615.315 J22.1@240.665,616.585 ; Q9.2@227.5,648.655 227.5,648.755 R120.2@225.742,648.755 ; 235.903,657.86 235.966,657.86 237.236,656.59 J34.2@237.807,656.59 ; C23.2@237.172,654.583 237.172,655.955 J34.2@237.807,656.59 ; J1.2@238.125,613.41 234.632,609.918 213.677,609.918 208.28,615.315 207.327,615.315 ; J1.1@238.125,616.585 236.855,616.585 235.585,615.315 227.647,615.315 226.695,616.267 226.695,632.625 ; J34.2@238.125,656.59 J34.2@237.807,656.59 ; C28.2@238.76,654.583 240.172,654.583 C6.2@240.513,654.24 ; J22.2@240.665,613.41 236.537,609.283 213.36,609.283 207.327,615.315 ; U5.63@241.66,652.023 241.66,650.812 244.86,647.611 ; 241.933,666.115 D12.1@241.933,667.215 ; 242.887,666.115 244.317,664.685 244.317,663.575 244.635,663.257 247.459,663.257 ; R10.2@243.713,626.428 243.713,626.872 243.42,627.165 C45.2@243.42,628.65 C46.2@243.42,630.555 243.42,631.19 243.42,632.04 244.86,633.48 U5.22@244.86,635.823 244.86,647.611 ; R154.2@247.65,613.41 246.38,614.68 242.57,614.68 242.252,614.362 242.252,612.457 238.442,608.647 213.042,608.647 206.692,614.997 ; TP6.1@247.65,670.242 248.285,669.607 R84.1@248.285,668.528 R66.1@250.507,668.528 ; U5.53@249.66,652.023 249.66,650.24 247.031,647.611 244.86,647.611 ; 252.412,667.385 254.317,667.385 254.635,667.067 ; D15.1@274.953,625.305 274.953,624.522 275.27,624.205 278.445,624.205 ; D4.1@278.445,625.305 278.445,624.205 ; U3.7@280.988,614.362 280.988,616.267 280.67,616.585 273.368,616.585 272.859,616.077 C12.2@271.145,616.077 271.145,613.727 272.733,612.14 281.623,612.14 284.162,614.68 289.877,614.68 KN2.3@292.18,616.982 ; J24.1@287.02,609.918 284.48,609.918 282.575,608.012 212.725,608.012 206.692,614.045 ; J31.1@298.45,633.095 301.625,629.92 309.245,629.92 313.373,625.793 313.373,615.315 307.975,609.918 295.592,609.918 294.957,610.553 294.957,612.775 301.625,619.442 301.625,624.42 ; R26.2@299.085,624.42 301.625,624.42 ; R112.2@305.118,624.42 301.625,624.42 ; 98.86,642.2 98.86,641.785 98.742,641.668 98.86,642.2 ; 206.692,614.045 206.692,614.997 ; 206.692,614.045 206.692,613.092 212.407,607.377 287.337,607.377 292.18,612.22 292.18,615.327 ; 206.692,614.997 206.692,615.315 ; 206.692,615.315 207.327,615.315 ; 226.695,632.625 226.695,635.483 ; 226.695,635.483 226.695,638.353 ; 278.445,624.205 282.257,624.205 282.575,624.522 282.575,626.428 283.845,627.697 292.1,627.697 292.735,627.062 292.735,622.3 292.18,621.745 KN2.3@292.18,617.538 KN2.3@292.18,616.982 ; 292.18,615.327 292.174,615.321 292.174,615.389 292.18,615.395 ; 292.18,615.327 292.18,615.395 ; 292.18,615.395 KN2.3@292.18,616.982
  Top Layer, Top w0.5: R6.1@97,613.5 91.4,613.5 85.5,619.4 85.5,650.4 86.2,651.1 88.2,651.1 89.4,649.9 89.4,648.4 88.5,647.5 88.5,644.8 91,642.3 98.105,642.3 ; R6.1@97.5,614 105.5,614 105.5,613.283 105.5,613 107.8,610.7 C5.1@113.6,610.7 ; C7.1@183,613 183.29,613 184.721,611.568 188.976,611.568 189.547,612.14
  Top Layer, Top w0.635: 116.522,642.938 117.443,643.858 117.443,649.065 123.222,649.065 123.222,643.858 D35.2@124.142,642.938 122.872,642.938 120.332,640.397 ; 185.102,642.938 189.547,638.492 J14.1@189.547,632.46
  Top Layer, Top w0.762: R154.2@247.65,613.41 R170.2@250.507,613.41 R162.2@253.365,613.41 R156.2@256.222,613.41
  Top Layer, Top w1: C5.1@113.6,610.7 114.3,610 118.34,610 D11.2@119.2,610.86 ; D11.2@119.34,611 D11.2@119.2,610.86 ; C7.1@183,613 183,610 180,607 121.8,607 119.2,609.6 D11.2@119.2,610.86
  Top Layer, Top w1.27: J17.1@206.692,625.475 210.82,625.475 212.407,627.062 212.407,628.65
  Bottom Layer, Bottom w0.254: 206.692,615.315 J17.1@206.692,625.475
  Bottom Layer, Bottom w0.305: J2.1@112.712,640.397 120.332,640.397 ; 189.547,612.14 J14.1@189.547,632.46 ; 212.407,628.65 J4.1@212.407,638.81 ; J24.1@287.02,609.918 297.18,609.918 ; J31.1@298.45,633.095 298.45,650.875
_RESET: C43.1 KN4.1 R55.2 TP157.1 U5.20 | length 42.2
  Top Layer, Top w0.292: 227.965,654.05 231.14,654.05 233.362,651.827 236.855,651.827 237.49,651.192 ; R55.2@237.91,628.65 C43.1@237.91,630.555 237.91,631.292 238.76,632.142 TP157.1@239.712,632.142 241.3,632.142 241.617,632.46 ; 239.712,650.875 240.665,649.923 240.665,640.08 243.26,637.485 U5.20@243.26,635.823
  Top Layer, Top w0.305: KN4.1@227.012,655.002 227.012,654.367 227.33,654.05 227.965,654.05 ; 237.49,651.192 239.395,651.192 239.712,650.875 ; 241.617,632.46 243.26,634.103 U5.20@243.26,635.823
_ROTARY_1: R108.1 R109.1 RS1.3 TP27.1 | length 112.1
  Top Layer, Top w0.292: R108.1@220.765,639.127 221.717,638.175 223.202,638.175 224.79,639.762 R109.1@225.425,639.762
  Top Layer, Top w0.305: RS1.3@142,664.7 142,666.828 143.192,668.02 ; TP27.1@143.51,667.067 143.51,667.702 143.192,668.02 ; R108.1@220.765,639.127 220.028,639.127 216.535,635.635 203.517,635.635 195.262,643.89 195.262,655.32 190.183,660.4 190.183,663.575 186.69,667.067 170.18,667.067 169.227,668.02 157.797,668.02 157.162,668.655 149.542,668.655 148.907,668.02 143.192,668.02
_ROTARY_2: R157.1 R158.1 RS1.4 TP31.1 | length 106.4
  Top Layer, Top w0.292: R157.1@220.765,637.222 221.717,636.27 223.52,636.27
  Top Layer, Top w0.305: RS1.4@146,664.7 146.05,664.75 146.05,666.75 146.637,667.337 TP31.1@147.32,667.337 ; TP31.1@147.32,666.75 TP31.1@147.32,667.337 ; R157.1@220.765,637.222 219.075,637.222 216.852,635 203.2,635 194.627,643.572 194.627,655.002 189.547,660.082 189.547,663.257 186.373,666.433 169.862,666.433 168.91,667.385 157.48,667.385 156.845,668.02 149.955,668.02 149.273,667.337 TP31.1@147.32,667.337 ; 223.52,636.27 224.155,636.905 R158.1@225.425,636.905
_ROTARY_3: R163.1 R164.1 RS1.5 TP29.1 | length 88.5
  Top Layer, Top w0.292: R163.1@220.765,635.317 221.717,634.365 223.837,634.365 224.155,634.048 R164.1@225.425,634.048
  Top Layer, Top w0.305: RS1.5@160.7,664.7 161.462,664.7 TP29.1@162.877,666.115 163.512,666.75 168.593,666.75 169.545,665.798 186.055,665.798 188.912,662.94 188.912,659.765 193.992,654.685 193.992,643.255 202.882,634.365 217.17,634.365 218.123,635.317 R163.1@220.765,635.317
_ROTARY_4: R159.1 R160.1 RS1.6 TP33.1 | length 81.9
  Top Layer, Top w0.292: R159.1@220.765,633.413 222.987,631.19 R160.1@225.425,631.19
  Top Layer, Top w0.305: RS1.6@166,664.7 166.462,665.163 TP33.1@168.275,665.163 177.8,665.163 180.657,662.305 180.657,659.765 183.197,657.225 190.5,657.225 193.357,654.367 193.357,642.938 202.565,633.73 217.487,633.73 217.805,633.413 R159.1@220.765,633.413
_SATIR_0: J38.1 J38.2 J39.1 J39.2 J41.1 J41.2 J42.1 J42.2 LD1.2 LD2.2 LD3.2 LD4.2 LD5.2 LD6.2 LD7.2 LD8.2 LD9.2 LD10.2 Q23.3 TP35.1 | length 184.2
  Top Layer, Top w0.292: LD1.2@263.95,683 267.075,683 269.875,685.8
  Top Layer, Top w0.305: LD4.2@263.95,659 263.95,660.19 265.748,661.987 J42.2@274.32,661.987 J41.1@274.32,660.082 ; LD5.2@264.05,651 LD5.2@263.95,651 263.95,652.57 268.923,657.543 J41.2@274.32,657.543 282.257,657.543 ; LD2.2@264.05,675 LD2.2@263.95,675 263.95,676.383 267.652,680.085 J38.1@274.32,680.085 ; 269.875,685.8 J39.1@274.32,685.8 285.18,685.8 286.45,684.53 LD6.2@286.45,683 LD6.2@286.55,683 ; J38.2@274.32,677.545 273.158,677.545 263.95,668.337 LD3.2@263.95,667 263.95,665.798 265.22,664.527 J42.1@274.32,664.527 285.115,664.527 286.385,665.798 286.385,666.935 LD8.2@286.45,667 LD8.2@286.55,667 ; J39.2@274.32,683.26 J38.1@274.32,680.085 ; LD9.2@286.45,659 286.45,657.925 286.067,657.543 282.257,657.543 ; LD7.2@286.55,675 LD7.2@286.45,675 286.45,676.527 282.892,680.085 J38.1@274.32,680.085 ; TP35.1@311.467,662.94 298.39,662.94 LD10.2@286.45,651 286.45,650.24 286.133,649.923 283.527,649.923 282.257,651.192 282.257,657.543
  Top Layer, Top w0.635: Q23.3@311.467,661.5 TP35.1@311.467,662.94
_SATIR_1: DISP1.12 J11.1 J11.2 Q26.3 TP77.1 | length 63
  Top Layer, Top w0.292: 300.355,663.892 314.325,663.892 TP77.1@315.277,662.94
  Top Layer, Top w0.305: 293.053,669.607 293.053,666.115 295.275,663.892 300.355,663.892 ; J11.1@293.053,679.767 293.053,682.625 294.64,684.212 304.483,684.212 306.89,686.62 DISP1.12@312.9,686.62
  Top Layer, Top w0.635: Q26.3@315.277,661.5 TP77.1@315.277,662.94
  Bottom Layer, Bottom w0.305: 293.053,669.607 J11.1@293.053,679.767
_SATIR_2: DISP1.9 J7.1 J7.2 Q27.3 TP78.1 | length 67.7
  Top Layer, Top w0.305: 296.863,669.607 296.863,666.115 298.45,664.527 317.5,664.527 TP78.1@319.087,662.94 ; J7.1@296.863,679.767 296.863,681.99 297.18,682.308 318.452,682.308 320.52,684.375 DISP1.9@320.52,686.62
  Top Layer, Top w0.635: Q27.3@319.087,661.5 TP78.1@319.087,662.94
  Bottom Layer, Bottom w0.305: 296.863,669.607 J7.1@296.863,679.767
_SATIR_3: DISP1.8 J6.1 J6.2 Q28.3 TP79.1 | length 67.9
  Top Layer, Top w0.305: 299.402,669.607 299.402,666.433 300.673,665.163 320.675,665.163 TP79.1@322.897,662.94 ; J6.1@299.402,679.767 319.087,679.767 323.06,683.74 DISP1.8@323.06,686.62
  Top Layer, Top w0.635: Q28.3@322.897,661.5 TP79.1@322.897,662.94
  Bottom Layer, Bottom w0.305: 299.402,669.607 J6.1@299.402,679.767
_SATIR_4: LD11.2 LD12.2 LD13.2 LD14.2 LD15.2 LD16.2 LD17.2 LD18.2 LD19.2 LD20.2 Q29.3 TP36.1 | length 296.8
  Top Layer, Top w0.305: LD11.2@309.05,651 LD11.2@308.95,651 308.928,650.977 308.928,649.923 312.738,646.112 322.58,646.112 328.93,652.462 331.45,652.462 ; TP36.1@326.707,662.94 331.45,662.94 ; LD12.2@331.55,651 LD12.2@331.45,651 331.45,652.462 ; LD15.2@353.95,651 360.488,651 364.49,655.002 376.555,655.002 ; LD13.2@353.95,667 371.792,667 374.015,669.222 374.015,670.56 374.332,670.877 376.555,670.877 ; LD14.2@354.05,659 LD14.2@353.95,659 357.89,662.94 376.555,662.94 ; LD16.2@385.05,683 LD16.2@384.95,683 384.95,682.13 384.493,681.673 376.873,681.673 376.555,681.355 376.555,676.91 376.873,676.592 384.493,676.592 384.95,676.135 LD17.2@384.95,675 384.95,673.875 384.493,673.418 376.873,673.418 376.555,673.1 376.555,670.877 ; 331.45,652.462 331.45,662.94 ; 331.45,662.94 331.45,666.73 336.55,671.83 342.265,671.83 347.345,666.75 347.345,649.288 348.615,648.017 383.222,648.017 384.95,649.745 LD20.2@384.95,651 384.95,652.005 384.493,652.462 376.873,652.462 376.555,652.78 376.555,655.002 ; 376.555,655.002 376.555,657.225 376.873,657.543 384.493,657.543 384.95,658 LD19.2@384.95,659 384.95,659.943 384.493,660.4 376.873,660.4 376.555,660.717 376.555,662.94 ; 376.555,662.94 376.555,665.163 376.873,665.48 384.493,665.48 384.95,665.937 LD18.2@384.95,667 384.95,667.88 384.493,668.337 376.873,668.337 376.555,668.655 376.555,670.877
  Top Layer, Top w0.635: Q29.3@326.707,661.5 TP36.1@326.707,662.94
AC2: J3.1 J3.2 JM1.1 KN9.4 R19.2 T1.2 TP85.1 | length 78.6
  Top Layer, Top w1.016: JM1.1@164.147,672.783 165.683,674.318 165.683,675.64 167.957,677.915 167.957,680.72 172.085,684.847 175.577,684.847
  Top Layer, Top w1.27: 175.577,684.847 TP85.1@179.705,684.847 183.515,684.847 188.595,679.767 193.675,679.767 J3.1@196.85,676.592
  Top Layer, Top w1.778: 196.85,661.352 200.977,657.225 200.977,648.335 ; 200.66,648.652 200.977,648.335 ; 205.105,647.065 202.248,647.065 200.977,648.335
  Bottom Layer, Bottom w0.305: 196.85,661.352 J3.1@196.85,676.592
BUTON_INP_0: R153.2 R154.1 SW1.2 SW1.4 SW5.2 SW5.4 TP39.1 | length 131.2
  Top Layer, Top w0.292: 246.062,618.173 R154.1@247.65,616.585 ; 246.062,620.077 246.38,620.395 256.222,620.395
  Top Layer, Top w0.305: 246.062,618.173 246.062,620.077 ; R153.2@256.222,619.125 256.222,620.395 257.746,620.395 259.397,622.046 259.397,632.422 SW1.2@259.975,633 ; TP39.1@270.192,633.095 272.733,635.635 291.465,635.635 293.053,637.222 300.355,637.222 301.942,635.635 314.642,635.635 315.277,636.27 323.532,636.27 324.167,635.635 342.265,635.635 344.9,633 SW5.2@349.975,633
  Top Layer, Top w0.635: SW1.4@266.025,633 270.097,633 TP39.1@270.192,633.095
  Top Layer, Top w1.27: SW1.2@259.975,633 SW1.4@266.025,633 ; SW5.2@349.975,633 SW5.4@356.025,633 SW5.4@356.375,633
BUTON_INP_1: R155.2 R156.1 SW2.2 SW2.4 SW6.2 SW6.4 TP41.1 | length 151.5
  Top Layer, Top w0.292: R156.1@256.222,616.585 257.81,618.173 257.81,619.506 260.032,621.728 260.032,629.285 260.667,629.92 270.827,629.92 273.907,633
  Top Layer, Top w0.305: R155.2@253.365,619.125 255.905,616.585 R156.1@256.222,616.585 ; 273.907,633 274.002,633.095 TP41.1@279.082,633.095 ; SW2.4@288.525,633 290.735,633 294.322,636.587 300.037,636.587 301.625,635 314.96,635 315.595,635.635 323.215,635.635 323.85,635 341.947,635 345.44,631.507 368.3,631.507 369.792,633 SW6.2@380.975,633
  Top Layer, Top w0.635: TP41.1@279.082,633.095 282.38,633.095 SW2.2@282.475,633
  Top Layer, Top w1.27: SW2.2@282.475,633 SW2.4@288.525,633 ; SW6.2@380.975,633 SW6.4@387.025,633
BUTON_INP_2: R161.2 R162.1 SW3.2 SW3.4 SW7.2 SW7.4 TP43.1 | length 256.6
  Top Layer, Top w0.3: 383.222,690.562 392.68,681.105 392.68,645.41 390.525,643.255
  Top Layer, Top w0.305: R161.2@250.507,619.125 253.047,616.585 R162.1@253.365,616.585 254.635,615.315 257.493,615.315 258.762,616.585 258.762,619.506 260.286,621.03 262.89,621.03 273.05,631.19 289.877,631.19 294.64,635.952 299.72,635.952 302.673,633 SW3.2@304.975,633 ; SW3.4@311.025,633 313.912,633 315.912,635 322.897,635 323.532,634.365 340.36,634.365 TP43.1@341.63,633.095 343.852,630.872 388.62,630.872 390.525,632.777 390.525,643.255 ; SW7.2@356.025,681 360.045,681 369.608,690.562 383.222,690.562
  Top Layer, Top w1.27: SW3.2@304.975,633 SW3.4@311.025,633 ; SW7.4@349.625,681 SW7.2@356.025,681
BUTON_INP_3: R170.1 R172.2 SW4.2 SW4.4 TP45.1 | length 105.9
  Top Layer, Top w0.305: R172.2@247.65,619.125 247.968,619.125 R170.1@250.507,616.585 250.825,616.585 252.73,614.68 257.81,614.68 259.397,616.267 259.397,619.188 260.604,620.395 263.207,620.395 273.05,630.237 289.877,630.237 294.957,635.317 299.402,635.317 303.53,631.19 313.055,631.19 316.23,634.365 322.58,634.365 323.945,633 SW4.2@327.475,633
  Top Layer, Top w0.635: SW4.4@333.525,633 333.62,633.095 TP45.1@337.82,633.095
  Top Layer, Top w1.27: SW4.2@327.475,633 SW4.4@333.525,633
BUTTON_0: C55.2 R153.1 TP40.1 U5.29 | length 17.9
  Top Layer, Top w0.292: U5.29@250.46,635.823 250.507,635.775 250.507,634.365 250.825,634.048 250.825,629.92 252.095,628.65 253.365,628.65 255.055,626.96 C55.2@255.27,626.96 254.317,626.008 254.317,624.522 254.952,623.887 TP40.1@255.587,623.887
  Top Layer, Top w0.635: TP40.1@255.587,623.887 256.222,623.252 R153.1@256.222,622.3
BUTTON_1: C56.2 R155.1 TP42.1 U5.28 | length 16.6
  Top Layer, Top w0.292: U5.28@249.66,635.823 249.66,634.26 250.19,633.73 250.19,629.602 251.778,628.015 253.047,628.015 253.365,627.697 C56.2@253.365,626.96 252.412,626.008 252.412,624.205 TP42.1@252.73,623.887
  Top Layer, Top w0.635: TP42.1@252.73,623.887 253.365,623.252 R155.1@253.365,622.3
BUTTON_2: C59.2 R161.1 TP44.1 U5.27 | length 15.3
  Top Layer, Top w0.292: U5.27@248.86,635.823 248.86,634.107 249.555,633.413 249.555,629.285 251.46,627.38 C59.2@251.46,626.96 250.507,626.008 250.507,624.205 TP44.1@250.19,623.887
  Top Layer, Top w0.635: TP44.1@250.19,623.887 250.19,622.617 R161.1@250.507,622.3